# Altium PCB CarteCapteurAvant3.PCBDOC
Units mm, origin at the board's own origin, x right, y up, seen from the top; angles counter-clockwise.
Board outline 299.72 x 199.9 mm, 2 copper layers (Top Layer, Bottom Layer); 58 components, 43 nets, 180 pads, 77 vias.
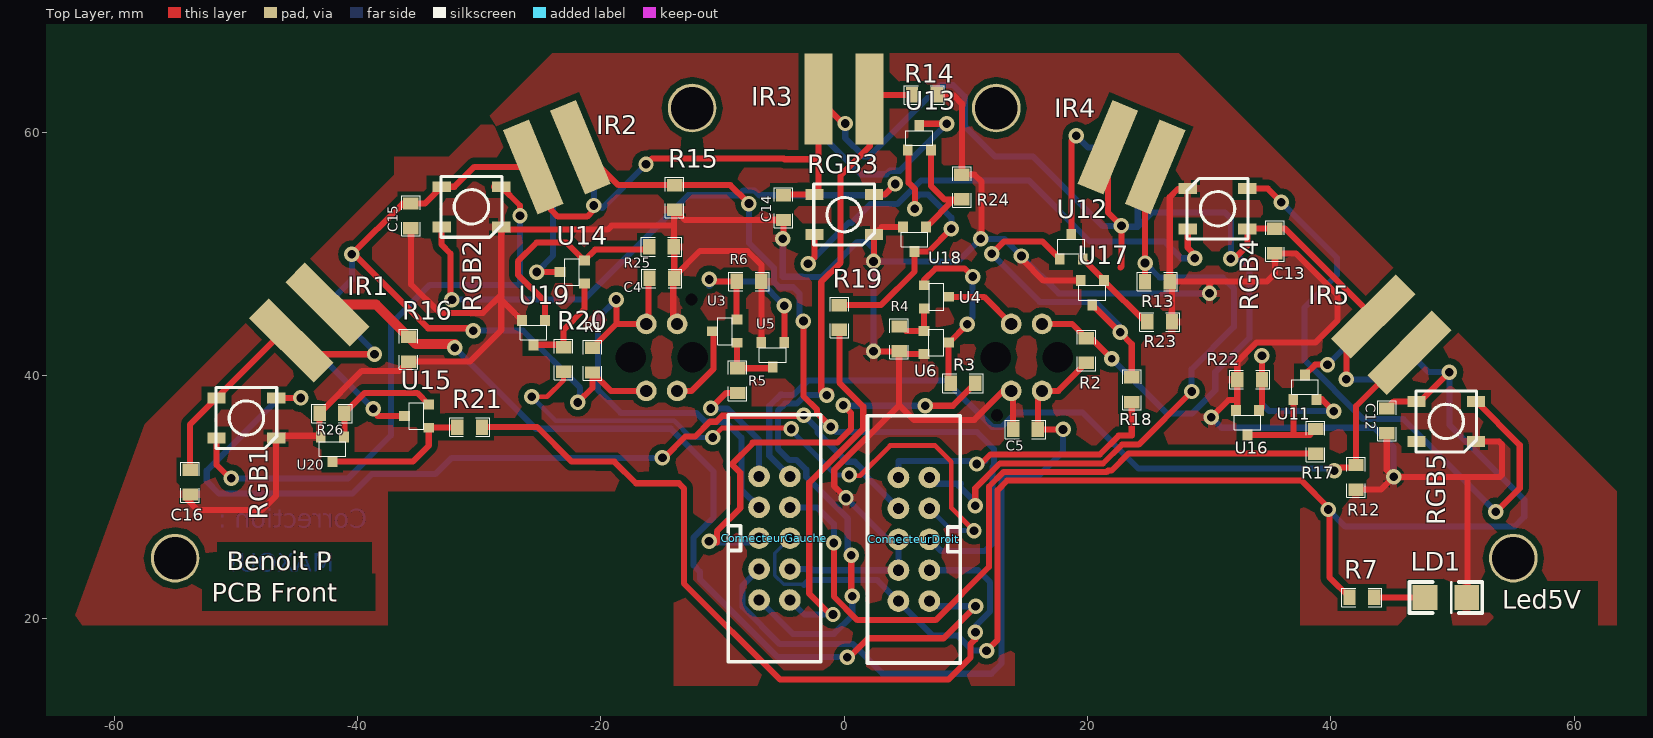
[diagram p0: Top Layer view]
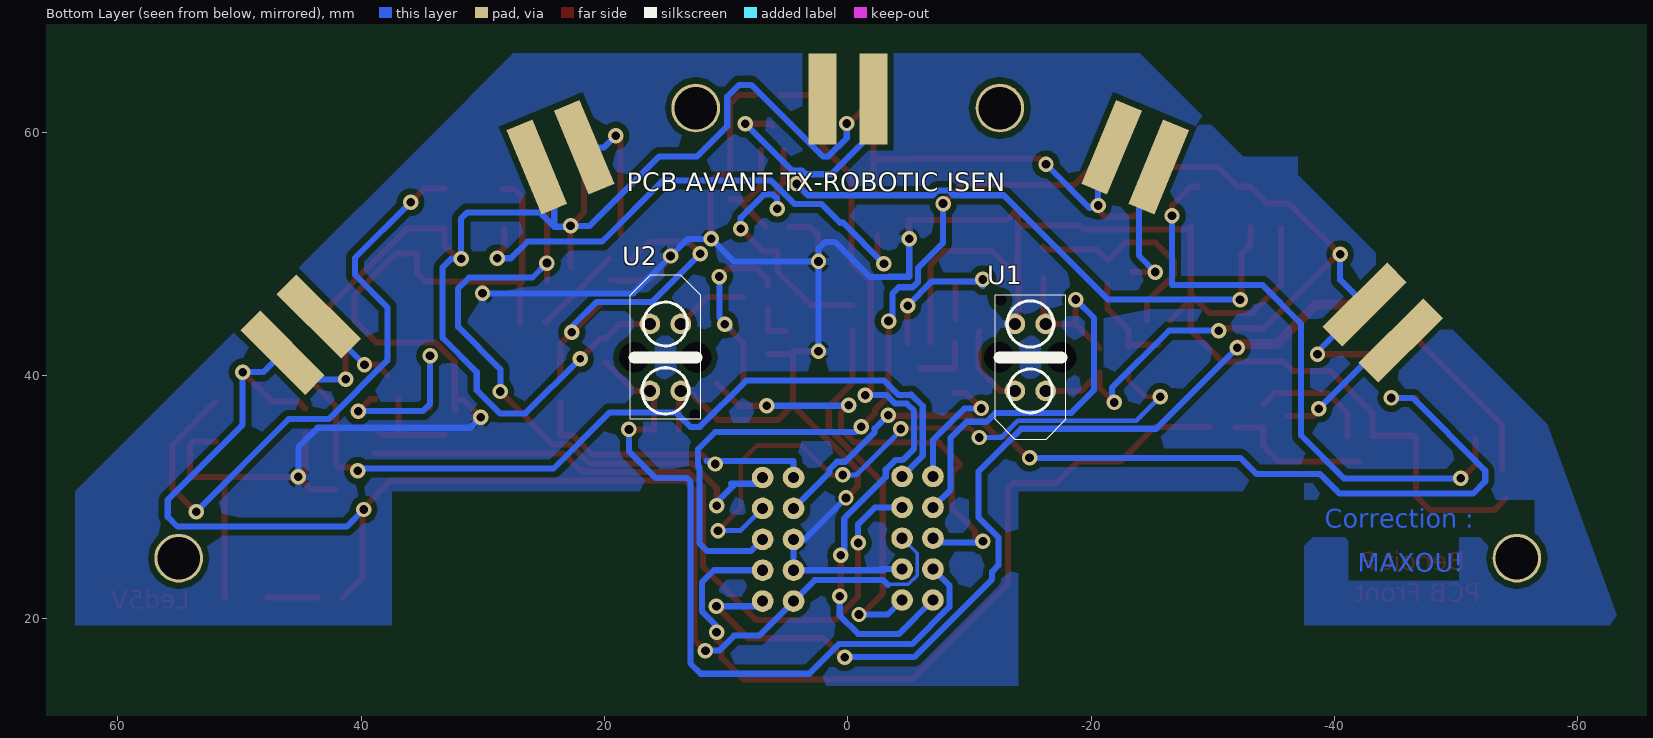
[diagram p1: Bottom Layer view, seen from below]

## Layer stack, top to bottom
Top Solder: solder mask 0.0102, Solder Resist, Dk 3.5
Top Layer: signal copper 0.0356
Dielectric1: dielectric 0.32, FR-4, Dk 4.8
Bottom Layer: signal copper 0.0356
Bottom Solder: solder mask 0.0102, Solder Resist, Dk 3.5

## Board outline
-147.116,-107.604 152.604,-107.604 152.604,92.294 -147.116,92.294

## Design rules (kind name [scope] priority, off if disabled: settings)
Clearance Clearance_bottom_polygon [OnLayer('Bottom Layer') Or OnLayer('Multi-Layer') vs OnLayer('Bottom Layer')  And  InPoly] p1: gap=0.508
Clearance Clearance_top_polygon [OnLayer('Top Layer')  Or OnLayer('Multi-Layer') vs OnLayer('Top Layer') And InPoly] p2: gap=0.508
Clearance Clearance_bottom [OnLayer('Bottom Layer') Or OnLayer('Multi-Layer') vs OnLayer('Bottom Layer')  And Not InPoly] p3: gap=0.203
Clearance Clearance_top [OnLayer('Top Layer')  Or OnLayer('Multi-Layer') vs OnLayer('Top Layer') And Not InPoly] p4: gap=0.203
Clearance Clearance_pad_to_pad [OnLayer('Multi-Layer') vs OnLayer('Multi-Layer')] p5: gap=0.254
ComponentClearance ComponentClearance_bottom [OnLayer('Bottom Overlay') vs OnLayer('Bottom Overlay')] p1: gap=0 collisioncheckmode=3 verticalgap=0.254 showdistances=FALSE
ComponentClearance ComponentClearance_top [OnLayer('Top Overlay') vs OnLayer('Top Overlay')] p2: gap=0 collisioncheckmode=3 verticalgap=0.254 showdistances=FALSE
FabricationTestPointUsage TestPointUsage [All] p1: valid=0 allowmultiple=FALSE
FabricationTestpoint Testpoint [All] p1: side=3 testpointundercomponent=TRUE minsize=1.016 maxsize=2.54 preferedsize=1.524 minholesize=0 maxholesize=1.016 preferedholesize=0.813 testpointgrid=0.025 allowsidetop=TRUE allowsidebottom=TRUE usegrid=TRUE gridtolerance=0
HoleSize [All] p1: absolutevalues=TRUE maxlimit=25.4 minlimit=0.406 maxpercent=80.000 minpercent=20.000
MinimumAnnularRing [PadXSize_AllLayers = PadYSize_AllLayers] p1: minimumring=0.203
PermittedLayers [All] p1: toplayerpermitted=TRUE bottomlayerpermitted=TRUE
PolygonConnect [All] p1: connectstyle=Relief reliefconductorwidth=0.61 reliefentries=4 polygonreliefangle="90 Angle" airgapwidth=0.254
RoutingVias [All] p1: holewidth=0.406 width=0.813 viastyle="Through Hole" minholewidth=0.4 minwidth=0.8 maxholewidth=0.6 maxwidth=10
SMDToPlane [All] p1: distance=0
SolderMaskExpansion [All] p1: expansion=0.102
ViasUnderSMD [All] p1: allowed=FALSE
Width Width_botom_top [OnLayer('Bottom Layer') or OnLayer('Top Layer')] p1: maxlimit=254 minlimit=0.256 preferedwidth=0.813 minimp=50.000000 maximp=50.000000 favimp=50.000000
25 further rules are at their usual default settings.

## Components (designator, comment, footprint, x,y, rotation, side; value= is the part's Value field where it differs from the comment)
C4 "CAP" 0805 -16,48 r0 top
C5 "CAP" 0805 15.92,35.58 r180 top
C12 "CAP" 0805 44.6,37.3 r270 top
C13 "CAP" 0805 35.4,52.09 r270 top
C14 "CAP" 0805 -4.99,54.83 r270 top
C15 "CAP" 0805 -35.61,54.15 r270 top
C16 "CAP" 0805 -53.76,32.27 r270 top
ConnecteurDroit "comment" HE10-10V 7,21.47 r180 top
ConnecteurGauche "comment" HE10-10V -7,31.72 r0 top
IR1 "infrared" Infrared -43.97,44.37 r45 top
IR2 "infrared" Infrared -23.62,57.97 r22.5 top
IR3 "infrared" Infrared 0,62.75 r0 top
IR4 "infrared" Infrared 23.62,57.97 r337.5 top
IR5 "infrared" Infrared 44.97,43.37 r315 top
LD1 "comment" LED1206 51.17,21.77 r180 top
R1 "RES" 0805 -20.69,42.29 r270 top
R2 "RES" 0805 19.9,41.05 r90 top
R3 "RES" 0805 10.78,39.38 r180 top
R4 "RES" 0805 4.51,42.01 r90 top
R5 "RES" 0805 -8.76,38.58 r90 top
R6 "RES" 0805 -6.81,47.75 r180 top
R7 "RES" 0805 43.57,21.77 r180 top
R12 "RES" 0805 42.07,32.66 r270 top
R13 "RES" 0805 24.73,47.73 r0 top
R14 "RES" 0805 5.57,63.08 r0 top
R15 "RES" 0805 -13.93,55.66 r270 top
R16 "RES" 0805 -35.81,43.19 r270 top
R17 "RES" 0805 38.76,33.58 r90 top
R18 "RES" 0805 23.64,37.83 r90 top
R19 "RES" 0805 -0.4,43.77 r90 top
R20 "RES" 0805 -23.06,40.31 r90 top
R21 "RES" 0805 -29.77,35.78 r180 top
R22 "RES" 0805 32.31,39.67 r0 top
R23 "RES" 0805 26.95,44.43 r180 top
R24 "RES" 0805 9.67,56.53 r270 top
R25 "RES" 0805 -14,50.6 r180 top
R26 "RES" 0805 -43.12,36.91 r0 top
RGB1 "LedRgbWs2812b" LedRgbWs2812b -49.14,36.52 r0 top
RGB2 "LedRgbWs2812b" LedRgbWs2812b -30.64,53.88 r0 top
RGB3 "LedRgbWs2812b" LedRgbWs2812b 0,53.24 r0 top
RGB4 "LedRgbWs2812b" LedRgbWs2812b 30.69,53.72 r180 top
RGB5 "LedRgbWs2812b" LedRgbWs2812b 49.49,36.24 r0 top
U1 "TCRT5000" "TCRT5000 Droit" -15,41.5 r270 bottom
U2 "TCRT5000" "TCRT5000 Droit" 15,41.5 r90 bottom
U3 "Transistors" BC817-40 -9.81,43.66 r270 top
U4 "Transistors" BC817-40 7.58,46.48 r90 top
U5 "Transistors" BC817-40 -5.87,41.71 r0 top
U6 "Transistors" BC817-40 7.57,42.73 r90 top
U11 "Transistors" BC817-40 37.87,39.06 r180 top
U12 "Transistors" BC817-40 18.67,50.61 r180 top
U13 "Transistors" BC817-40 6.18,59.55 r180 top
U14 "Transistors" BC817-40 -22.36,48.52 r270 top
U15 "Transistors" BC817-40 -35.15,36.68 r270 top
U16 "Transistors" BC817-40 33.15,36.14 r0 top
U17 "Transistors" BC817-40 20.4,46.82 r0 top
U18 "Transistors" BC817-40 5.78,51.21 r0 top
U19 "Transistors" BC817-40 -25.54,43.54 r0 top
U20 "Transistors" BC817-40 -42.07,33.96 r0 top

## Footprints (in the part's own frame and the unit in brackets; to place one, negate y for a bottom-side part, rotate by r counter-clockwise, add the part's x,y. Pads: shape width x height; smd on the part's side, far side on the other; paste and mask are expansions set on the pad)
0805 [mil]
  rect 40x50 smd: 1(0,0) 2(80,0)
  silkscreen extent -25,-30 105,30
BC817-40 [mm]
  rect 0.8x0.9 smd: 1(0.95,1) 2(-0.95,1) 3(0,-1)
  silkscreen extent -1.1,-0.6 1.1,0.6
HE10-10V [mil]
  round 70 hole 36: 1(0,0) 2(100,0) 3(0,-100) 4(100,-100) 5(0,-200) 6(100,-200) 7(0,-300) 8(100,-300) 9(0,-400) 10(100,-400)
  silkscreen extent -100,-600 200,200
Infrared [mm]
  rect 2.3x7.5 smd far side: gndEmitter(-2.1,0) VCC(2.1,0)
  rect 2.3x7.5 smd: gndReceiver(2.1,0) VCC(-2.1,0)
LED1206 [mil]
  rect 80x80 smd: A(135,0) K(0,0)
  silkscreen extent -50,-50 185,50
LedRgbWs2812b [mm]
  rect 1.5x0.9 smd: din(2.45,1.65) dout(-2.45,-1.65) GND(2.45,-1.65) VCC(-2.45,1.65)
  silkscreen extent -2.5,-2.5 2.5,2.5
"TCRT5000 Droit" [mm]
  round 1.7 hole 1: 1(-2.75,1.27) 2(2.75,1.27) 3(-2.75,-1.27) 4(2.75,-1.27)
  round 0 hole 1: 21(-4.75,-2.45)
  round 1.524 hole 2.5: 21(0,2.54) 22(0,-2.54)
  silkscreen extent -5.1,-2.9 6.75,2.9

## Part data
C4 C5 C12 C13 C14 C15 C16: "capacité non polarisée"
ConnecteurDroit ConnecteurGauche: library part HE10-10, "10-pin connector"
IR1 IR2 IR3 IR4 IR5: library part RPR-359F
LD1: library part LED, "LED 5mm/3mm/CMS"
R1 R2 R3 R4 R5 R6 R7 R12 R13 R14 R15 R16 R17 R18 R19 R20 R21 R22 R23 R24 R25 R26: "resistance"
U11 U12 U13 U14 U15 U16 U17 U18 U19 U20: "NPN transistor"

## Free pads (board coordinates)
  round 4 hole 3.5: 0(-55,25) 1(-12.5,62) 2(12.5,62) 3(55,25)

## Via types
v1: diameter 1.27, hole 0.711, Top Layer to Bottom Layer, 76 vias
v2: diameter 1.27, hole 0.6, Top Layer to Bottom Layer, 1 vias

## Nets (pads, with @x,y where several pads share a name; then routed paths per layer and width w, separated by ;. In a path a pad name is that pad's centre, name@x,y a point inside that pad or via, vN(x,y) a via of type N, cw(c..) or ccw(c..) an arc to the next point about the centre after c; other vN are vias at no path point)
GND: C4.2 C5.2 C12.2 C13.2 C14.2 C15.2 C16.2 ConnecteurDroit.4 ConnecteurDroit.6 ConnecteurGauche.8 LD1.K R4.1 R6.1 R12.2 R13.2 R14.2 R15.2 R16.2 R22.1 R23.1 R24.1 R25.1 R26.1 RGB1.GND RGB2.GND RGB3.GND RGB4.GND RGB5.GND U1.3 U2.3 U5.2 U6.2 U16.2 U17.2 U18.2 U19.2 U20.2 | length 333.8
  Top Layer w0.5: C16.2@-54.089,29.909 -53.13,28.95 -47.87,28.95 -46.69,30.13 RGB1.GND ; RGB1.GND@-46.5,35.06 -43.12,35.06 R26.1 -39.64,40.39 -36.578,40.39 R16.2 -30.782,41.158 -28.19,43.75 -28.19,46.24 ; C15.2 -35.61,47.51 -33.262,45.162 -29.688,45.162 -28.19,46.66 ; U19.2 -28.19,46.24 ; U1.3@-14.048,44.568 -14.048,48.07 C4.2@-13.968,48.15 ; U5.2@-6.81,42.72 R6.1 -6.81,49.11 -7.95,50.25 -11.868,50.25 C4.2@-13.968,48.15 ; v1(-5.05,51.27) -4.99,51.33 C14.2 -13.1,52.798 R15.2 -14,53.558 -14,52.34 ; v1(0.15,29.95) -0.82,30.92 -0.82,32.251 4.51,37.581 ; v1(2.41,42) 4.5,42 R4.1 4.51,37.59 ; v1(2.41,49.39) 2.45,49.43 RGB3.GND 3.07,52.21 U18.2 ; 4.514,37.586 5.73,36.37 10.69,36.37 13.07,38.75 U2.3 13.888,38.592 C5.2 ; R4.1@4.74,41.78 U6.2 ; R14.2 8.96,63.08 9.67,62.37 R24.1 10.71,56.53 11.29,55.95 11.29,51.32 v1(11.22,51.25) ; v1@14.62,49.57 16.37,47.82 U17.2 ; R23.1 26.95,47.542 R13.2 ; RGB4.GND@28.38,55.36 27.44,55.36 26.762,54.682 R13.2 ; v1(30.03,46.77) 30.03,47.51 30.25,47.73 ; v1(30.18,36.57) 31.61,38 32.31,38 ; U16.2 32.31,37.25 32.31,38 ; R12.2 44.108,30.628 v1(45.16,31.68) ; C12.2 44.6,32.24 v1(45.16,31.68) ; LD1.K 51.25,21.85 51.25,31.68 ; RGB5.GND 53.82,34.59 54.06,34.35 54.06,31.84 53.9,31.68 51.25,31.68 ; -28.19,46.24 -28.19,46.66 ; -28.19,46.66 RGB2.GND -27.96,52 -19.451,52 -19.111,52.34 -14,52.34 ; -14,52.34 R25.1 -13.968,50.568 C4.2@-13.968,48.15 ; R13.2 30.25,47.73 ; 30.25,47.73 34.75,47.73 35.4,48.38 C13.2 37.122,50.058 40.56,46.62 40.56,44.55 38.728,42.718 33.889,42.718 32.31,41.139 R22.1 32.31,38 ; v1(45.16,31.68) 51.25,31.68
  Bottom Layer w0.5: v1(-5.05,51.27) -5.05,48.13 -3.429,48.13 -3.421,48.122 -1.788,48.122 1.09,51 1.85,51 2.41,50.44 v1(2.41,49.39) ; ConnecteurGauche.8 -2.69,24.1 ; -2.99,24.01 ConnecteurDroit.4 ConnecteurDroit.6 3.55,26.55 v1(0.15,29.95) ; v1@2.41,42.3 v1(2.41,49.39) ; v1(30.03,46.77) 17.64,46.77 v1(14.57,49.84) 13.16,51.25 v1(11.22,51.25) 9.36,49.39 v1(2.41,49.39) ; v1(30.18,36.57) 31.03,35.72 43.58,35.72 45.16,34.14 v1(45.16,31.68)
LEFTLINESENSOR: C4.1 ConnecteurGauche.3 R1.1 U1.1 | length 38.8
  Top Layer w0.5: R1.1 -18.73,44.25 ; v1@-18.79,46.32 v1(-18.73,46.26) -18.73,44.25 ; U1.1 -18.73,44.25 ; U1.1@-16.08,44.44 C4.1@-16.08,48.07
  Bottom Layer w0.5: v1(-18.73,46.26) -20.25,44.74 -20.25,38.83 -18.366,36.946 -12.145,36.946 -11.416,36.217 -9.767,36.217 -8.45,34.9 -8.45,30.63 ConnecteurGauche.3
LEFTLINESENSOR_COMMANDE: ConnecteurGauche.1 R5.1 | length 10.8
  Top Layer w0.5: v1(-10.965,37.305) -9.69,38.58 R5.1
  Bottom Layer w0.5: v1(-10.965,37.305) -9.605,37.305 -7,34.7 ConnecteurGauche.1
LEFTSENSOR: ConnecteurDroit.1 IR1.gndReceiver R16.1 | length 77.6
  Top Layer w0.5: v1@0.665,17.105 1.98,18.42 8.17,18.42 v1(10.8,21.05)
  Top Layer w0.8: IR1.gndReceiver -38.475,45.855 R16.1 -35.22,42.6 v1@-32,42.6
  Bottom Layer w0.5: v1(-32,42.3) -25.34,35.64 -14.25,35.64 -10.73,32.12 -10.73,28.36 -12.38,26.71 -12.38,24.41 -11.86,23.89 -11.86,23.271 -5.449,16.86 v1(0.26,16.86) ; ConnecteurDroit.1 7.42,21.05 v1(10.8,21.05)
LEFTSENSORCOMMAND: ConnecteurDroit.3 R21.1 | length 66.3
  Top Layer w0.5: R21.1 -25.24,35.78 -22.4,32.94 -20.45,32.94 -20.442,32.932 -18.885,32.932 -17.113,31.16 -13.59,31.16 -13.17,30.74 -13.17,22.92 -5.28,15.03 8.58,15.03 10.372,16.822 10.372,17.919 10.79,18.337 v1(10.79,18.92)
  Bottom Layer w0.5: ConnecteurDroit.3 11,24.01 12,23.01 12,20.62 10.79,19.41 v1(10.79,18.92)
MIDLEFTSENSOR: ConnecteurDroit.5 IR2.gndReceiver R15.1 | length 65
  Top Layer w0.5: IR2.gndReceiver -18.566,55.66 R15.1 -9.35,55.66 v1@-7.98,54.29 ; v1(-3.35,44.49) -3.35,38.329 -2.222,37.201 -2.222,36.902 v1(-1.11,35.79)
  Bottom Layer w0.5: v1(-7.83,54.15) -7.83,50.91 -5.753,48.833 -5.753,47.679 -5.341,47.267 -4.187,47.267 -3.686,46.766 v1@-3.686,44.55 ; v1(-1.11,35.79) -0.69,35.37 10.91,35.37 12.313,33.967 12.313,32.586 12.2,32.472 12.2,26.23 11.55,25.58 7.97,25.58 ConnecteurDroit.5
MIDLEFTSENSORCOMMAND: ConnecteurDroit.7 R20.1 | length 53.3
  Top Layer w0.4: v1(-25.67,38.27) -24.43,38.27 -23.06,39.64 R20.1 ; v1@-10.64,35.11 -10.04,35.71 -4.27,35.71 v1(-4.36,35.62) ; v1@0.63,31.78 1.3,31.78 3.77,34.25 7.48,34.25 8.8,32.93 8.8,29.13 v1(10.67,27.26)
  Bottom Layer w0.4: v1(-25.67,38.27) -23.693,36.293 -13.979,36.293 -12.606,34.92 v1(-10.8,34.92) ; v1@-4.005,35.145 -0.7,31.84 v1(0.43,31.84) ; ConnecteurDroit.7 8.83,27.26 v1(10.67,27.26)
MIDRIGHTSENSOR: ConnecteurDroit.9 IR4.gndReceiver R13.1 | length 55.6
  Top Layer w0.5: v1(10.77,29.32) 10.77,30.75 12.8,32.78 21.274,32.78 22.834,34.34 24.2,34.34 v1(28.56,38.7) ; R13.1 v1(24.73,49.26) 24.73,56.336 IR4.gndReceiver
  Bottom Layer w0.5: ConnecteurDroit.9 7.51,31.12 9.59,31.12 9.415,30.945 10.77,29.59 v1(10.77,29.32) ; v1(24.73,49.26) 25.92,48.07 31.13,48.07 32.03,47.17 32.03,44.01 28.56,40.54 v1(28.56,38.7)
MIDRIGHTSENSORCOMMAND: ConnecteurDroit.10 R18.1 | length 24.9
  Top Layer w0.5: v1@11.04,32.55 12.01,33.52 21.02,33.52 22.57,35.07 23.64,35.07 R18.1
  Bottom Layer w0.5: ConnecteurDroit.10 4.46,32.99 11.61,32.99
  other v1: 10.91,32.74
MIDSENSOR: ConnecteurGauche.9 IR3.gndReceiver R14.1 | length 63.2
  Top Layer w0.5: v1@-1.125,38.715 -1.885,38.715 -1.885,47.705 -0.3,49.29 -0.3,56.47 2.1,58.87 IR3.gndReceiver 2.43,63.08 R14.1 ; v1@0.58,22.17 v1(0.58,25.24)
  Bottom Layer w0.5: ConnecteurGauche.9 -4.21,18.77 -0.85,18.77 0.66,20.28 v1(0.66,21.88) ; v1(-1.44,38.4) -3.187,38.4 -3.888,37.699 -4.861,37.699 -5.448,37.112 -5.448,34.009 -4.501,33.062 -3.904,33.062 -3.118,32.276 -3.118,31.679 0.29,28.271 0.29,25.53 v1@0.41,25.41
MIDSENSORCOMMAND: ConnecteurGauche.10 R19.1 | length 31.5
  Top Layer w0.5: v1@-0.92,20.14 -2.87,22.09 -2.87,31.204 -0.278,33.797 -0.269,33.797 1.57,35.636 1.57,37.459 -0.4,39.429 R19.1
  Bottom Layer w0.5: ConnecteurGauche.10 -3.27,20.37 v1(-0.92,20.37) v1@-0.69,20.14
NetIR1_gndEmitter: IR1.gndEmitter U15.3 | length 11.3
  Top Layer w0.5: -38.34,36.68 U15.3
  Bottom Layer w0.5: IR1.gndEmitter -44.295,42.885 v1(-38.7,37.29)
NetIR2_gndEmitter: IR2.gndEmitter U14.3 | length 11.8
  Top Layer w0.5: v1@-25.3,48.5 v1(-25.28,48.52) U14.3
  Bottom Layer w0.5: IR2.gndEmitter -23.92,55.526 -23.92,52.29 -23.92,49.88 v1(-25.28,48.52)
NetIR3_gndEmitter: IR3.gndEmitter U13.3 | length 18.7
  Top Layer w0.5: U13.3 6.34,60.71 v1(8.43,60.71)
  Bottom Layer w0.5: IR3.gndEmitter -2.1,60.02 1.36,56.56 3.471,56.56 3.759,56.848 4.568,56.848 v1(8.43,60.71)
NetIR4_gndEmitter: IR4.gndEmitter U12.3 | length 11.3
  Top Layer w0.5: U12.3 18.67,59.33 v1(19.07,59.73)
  Bottom Layer w0.5: v1(19.07,59.73) 20.026,58.774 IR4.gndEmitter
NetIR5_gndEmitter: IR5.gndEmitter U11.3 | length 7.7
  Top Layer w0.5: U11.3 38.71,40.9 38.7,40.91 v1(39.73,40.91)
  Bottom Layer w0.5: v1(39.73,40.91) 43.485,44.665 IR5.gndEmitter
NetLD1_A: LD1.A R7.1 | length 4.2
  Top Layer w0.5: R7.1 LD1.A
NetR3_2: R3.2 U4.1 U6.3 | length 15.1
  Top Layer w0.5: U4.1 6.58,47.88 7.51,48.81 9.9,48.81 v1(10.56,48.15) ; R3.2@8.588,39.47 8.57,39.488 U6.3 8.62,42.73 v1(10.11,44.22)
  Bottom Layer w0.5: v1@9.67,43.91 10.56,44.8 v1(10.56,48.15)
NetR4_2: R4.2 U4.2 U6.1 | length 3.3
  Top Layer w0.5: R4.2@5.1,43.68 U6.1 6.56,43.69 U4.2@6.56,45.46
NetR5_2: R5.2 U3.1 U5.3 | length 4.9
  Top Layer w0.5: U3.1 -8.81,40.662 R5.2 U5.3@-5.968,40.612
NetR6_2: R6.2 U3.2 U5.1 | length 16.2
  Top Layer w0.5: v1(-11.09,47.91) -10.93,47.75 R6.2 U3.2@-8.842,44.642 ; U5.1 v1(-4.92,45.76)
  Bottom Layer w0.5: v1(-11.09,47.91) -11.09,47.37 -10.71,47.75 -6.91,47.75 v1(-4.92,45.76)
NetR17_2: R17.2 U11.1 U16.3 | length 8.5
  Top Layer w0.5: U16.3 38.288,35.14 R17.2 ; 36.92,35.32 U11.1
NetR18_2: R18.2 U12.1 U17.3 | length 26.9
  Top Layer w0.5: v1(12.12,50.02) 13.14,51.04 16.29,51.04 U12.1 ; U17.3 22.66,43.56 v1(22.68,43.56) 23.64,42.6 R18.2
  Bottom Layer w0.5: v1(12.12,50.02) 16.073,46.067 20.653,46.067 v1@22.63,44.09
NetR19_2: R19.2 U13.1 U18.3 | length 23.5
  Top Layer w0.5: R19.2 3.022,45.802 5.78,48.56 U18.3 6.94,50.21 v1(8.81,52.08) ; U13.1 5.298,58.482 5.298,55.862 5.81,55.35 v1(5.81,53.73)
  Bottom Layer w0.5: v1(5.81,53.73) 5.81,54.54 6.16,54.89 6.91,54.89 8.81,52.99 v1(8.81,52.08)
NetR20_2: R20.2 U14.1 U19.3 | length 8.5
  Top Layer w0.5: U19.3 -23.258,42.54 R20.2 -23.06,43.78 -21.36,45.48 U14.1
NetR21_2: R21.2 U15.1 U20.3 | length 12.2
  Top Layer w0.5: U20.3 -35.44,32.96 -34.15,34.25 U15.1 R21.2@-31.852,35.73
NetR22_2: R22.2 U11.2 U16.1 | length 16.2
  Top Layer w0.5: v1(34.34,41.63) 34.34,39.672 R22.2 U16.1@34.342,37.382 ; U11.2 39.27,38.06 v1(40.24,37.09)
  Bottom Layer w0.5: v1@34.34,41.71 v1(34.34,41.63) 34.34,37.69 34.94,37.09 v1(40.24,37.09)
NetR23_2: R23.2 U12.2 U17.1 | length 7.5
  Top Layer w0.5: U12.2 21.35,47.88 U17.1 24.74,44.43 R23.2
NetR24_2: R24.2 U13.2 U18.1 | length 9.8
  Top Layer w0.5: U18.1 9.018,54.498 R24.2 8.232,54.498 7.13,55.6 U13.2
NetR25_2: R25.2 U14.2 U19.1 | length 18.3
  Top Layer w0.5: U19.1 -24.59,46.06 -26.82,48.29 -26.82,49.4 -25.27,50.95 -22.84,50.95 U14.2 -20.47,50.36 -16.272,50.36 R25.2
NetR26_2: R26.2 U15.2 U20.1 | length 9.9
  Top Layer w0.5: U20.1@-41.088,34.992 R26.2 -39.418,38.58 -35.1,38.58 U15.2
NetRGB1_dout: RGB1.dout RGB2.din | length 48.6
  Top Layer w0.5: RGB1.dout -51.59,32.66 v1@-50.57,31.64 ; RGB2.din@-28.8,55.53 RGB2.din -26.65,53.99 v1(-26.65,53.14)
  Bottom Layer w0.5: v1(-50.37,31.56) -40.78,31.56 -37.25,35.09 -37.25,44.26 -34.05,47.46 -26.65,47.46 v1(-26.65,53.14)
NetRGB2_dout: RGB2.dout RGB3.din | length 48.7
  Top Layer w0.5: RGB2.dout -33.09,50.77 -32.36,50.04 v1@-32.36,46.66 ; RGB3.din 3.34,54.89 v1(4.21,55.76)
  Bottom Layer w0.5: v1(-32.24,46.25) -21.4,46.25 -12.82,54.83 -8.689,54.83 -8.281,55.238 -7.379,55.238 -6.971,54.83 3.28,54.83 v1@4.18,55.73
NetRGB3_dout: RGB3.dout RGB4.din | length 42.1
  Top Layer w0.5: v1(-2.97,49.21) -2.45,49.73 RGB3.dout ; RGB4.din 28.24,50.52 v1@28.74,50.02
  Bottom Layer w0.5: v1(-2.97,49.21) 0.39,52.57 0.62,52.57 2.176,54.126 4.394,54.126 6.318,56.05 15.17,56.05 20.19,51.03 26.31,51.03 27.69,49.65 v1(28.82,49.65)
NetRGB4_dout: RGB4.dout RGB5.din | length 51.5
  Top Layer w0.5: RGB4.dout 34.83,55.37 v1(35.94,54.26) ; RGB5.din 55.53,34.3 55.53,30.75 v1@53.6,28.82
  Bottom Layer w0.5: v1(35.94,54.26) 40.51,49.69 40.51,48.28 37.84,45.61 37.84,41.261 42.678,36.423 45.977,36.423 v1(53.57,28.83)
NetU1_4: U1.4 U3.3 | length 6.9
  Top Layer w0.5: U1.4 -12.54,38.75 -10.757,40.533 -10.757,43.607 U3.3
NetU2_4: U2.4 U4.3 | length 6.1
  Top Layer w0.5: U4.3 11.5,46.48 U2.4
"RGB LED FRONT": ConnecteurDroit.8 RGB1.din | length 76.8
  Top Layer w0.5: RGB1.din v1(-44.66,38.17) v1@-44.63,38.14 ; v1@-15.12,33.25 v1(-14.94,33.25) -14.8,33.25 -13.048,35.002 -12.257,35.002 -11.042,36.217 -10.514,36.217 -10.023,36.708 -3.352,36.708 v1(-3.31,36.75)
  Bottom Layer w0.5: v1(-44.66,38.17) -46.42,38.17 -52.4,32.19 -52.4,31.31 -51.39,30.3 -40.44,30.3 -38.81,31.93 -33.59,31.93 -32.27,33.25 v1(-14.94,33.25) ; v1(-3.31,36.75) -2.198,35.638 -2.198,35.339 0.213,32.928 0.881,32.928 1.518,32.291 1.518,32.032 ConnecteurDroit.8
RIGHTLINESENSOR: C5.1 ConnecteurGauche.7 R2.1 U2.1 | length 60.6
  Top Layer w0.5: v1@18.11,35.7 v1(17.99,35.58) C5.1 15.92,38.4 U2.1 17.6,38.75 R2.1
  Bottom Layer w0.5: ConnecteurGauche.7 -8.342,22.758 -8.342,20.992 -5.28,17.93 -0.209,17.93 -0.191,17.948 0.711,17.948 3.159,15.5 12.1,15.5 12.94,16.34 12.94,31.31 13.21,31.58 15.77,31.58 17.99,33.8 v1(17.99,35.58)
RIGHTLINESENSOR_COMMANDE: ConnecteurGauche.5 R3.1 | length 37.2
  Top Layer w0.5: -10.47,26.3 -10.47,27.194 -8.547,29.118 -8.547,32.021 -9.238,32.712 -7.495,34.455 ; -7.54,34.5 -0.56,34.5 0.55,35.61 0.55,36.94 v1(-0.09,37.58) ; v1(6.67,37.53) 8.93,37.53 R3.1
  Bottom Layer w0.5: v1(-11.11,26.38) -10.9,26.38 -10.82,26.3 -7.72,26.3 -7.38,26.64 ConnecteurGauche.5 ConnecteurGauche.5@-7.33,26.31 ; v1(-0.09,37.58) -0.04,37.53 v1(6.67,37.53)
RIGHTSENSOR: ConnecteurGauche.2 IR5.gndReceiver R12.1 | length 70.8
  Top Layer w0.5: v1(40.27,32.18) 40.5,32.18 40.79,32.47 41.88,32.47 R12.1 42.07,37.5 IR5.gndReceiver
  Bottom Layer w0.5: ConnecteurGauche.2 -6.16,33.42 -6.16,37.51 -5.232,38.438 -5.117,38.438 -5.081,38.402 -4.179,38.402 -2.991,39.59 8.362,39.59 12.155,35.797 12.945,35.797 14.128,36.98 19.57,36.98 24.18,32.37 v1@40.27,32.37
RIGHTSENSORCOMMAND: ConnecteurGauche.4 R17.1 | length 60.1
  Top Layer w0.5: v1@-0.85,25.744 -0.85,21.851 1.091,19.91 7.52,19.91 11.904,24.294 11.904,30.89 13.091,32.077 21.566,32.077 21.682,32.193 21.973,32.193 23.39,33.61 R17.1@38.95,33.61
  Bottom Layer w0.5: ConnecteurGauche.4 -2.24,29.18 -0.85,27.79 v1@-0.85,25.96
  other v1: -0.85,26.25
"VCC 5V": C12.1 C13.1 C14.1 C15.1 C16.1 ConnecteurDroit.2 ConnecteurGauche.6 IR1.VCC IR2.VCC IR3.VCC IR4.VCC IR5.VCC R1.2 R2.2 R7.2 RGB1.VCC RGB2.VCC RGB3.VCC RGB4.VCC RGB5.VCC U1.2 U2.2 | length 367.8
  Top Layer w0.5: C16.1@-53.78,32.27 -53.78,35.98 RGB1.VCC -46.875,42.885 -45.455,42.885 -44.33,41.76 v1(-38.61,41.76) ; v1@-31,43.9 -34.2,43.9 -40.27,49.97 v1(-40.47,49.97) -36.29,54.15 C15.1 -34.47,54.15 RGB2.VCC -32.04,55.53 -30.404,57.166 -25.56,57.166 -24.1,55.706 -24.1,53.63 -23.54,53.07 -21.13,53.07 -20.58,53.62 v1(-20.58,53.99) ; v1(-21.9,37.8) -20.69,39.01 R1.2 -19.182,38.75 U1.2 ; v1(-16.29,57.37) -15.81,57.85 -4.95,57.85 -4.89,57.79 -2.1,57.79 ; C14.1 -4.93,54.89 RGB3.VCC -2.1,55.24 -2.1,57.79 ; v1@-0.185,60.835 -2.1,62.75 -2.1,57.79 ; v1(11.7,17.4) 12.607,18.307 12.607,30.598 13.383,31.374 21.857,31.374 21.883,31.4 37.566,31.4 v1@39.883,29.083 ; U2.2 18.732,44.25 R2.2 20.318,43.082 v2(22,41.4) ; IR4.VCC@21.68,58.774 21.68,53.43 v1(22.79,52.32) 22.79,48.99 22.7,48.9 ; v1@31.9,49.45 33.14,50.69 33.14,52.09 C13.1 36.25,52.09 43.485,44.855 41.28,42.65 v1(41.28,39.7) ; v1@39.9,29 39.9,23.408 R7.2 ; C12.1 45.19,37.89 RGB5.VCC 47.35,37.89 v1(49.75,40.29)
  Bottom Layer w0.305: ConnecteurGauche.6 -5.7,25.4 -5.7,24.915 -5.705,24.91 -5.705,23.584 -4.976,22.855 -3.355,22.855 -3.3,22.8
  Bottom Layer w0.5: v1(-40.47,49.97) -40.47,47.87 -42.485,45.855 -38.61,41.98 v1(-38.61,41.76) ; v1(-30.5,43.7) -26.4,43.7 -21.7,39 v1@-21.7,37.6 ; IR2.VCC@-21.68,58.774 -20.55,57.644 -20.55,54.43 -19.89,53.77 v1(-16.29,57.37) ; -3.3,22.8 -2.9,23.2 2.73,23.2 ConnecteurDroit.2 7.297,18.633 9.332,18.633 10.566,17.4 v1(11.7,17.4) ; v1(0.09,60.73) 0.09,59.53 1.59,58.03 2.05,58.03 7.93,63.91 8.94,63.91 9.91,62.94 9.91,60.51 12.39,58.03 15.51,58.03 21.22,52.32 v1(22.79,52.32) 22.87,52.24 24.13,52.24 ; v2(22,41.4) 26.5,36.9 28.6,36.9 30.5,38.8 30.5,40.3 33.3,43.1 33.3,48.9 32.59,49.61 v1(31.78,49.61) 31.78,52.93 31.29,53.42 25.31,53.42 24.13,52.24 ; IR4.VCC@25.56,57.166 24.13,55.736 24.13,52.24 ; v1@40.1,29 v1(39.8,29) 41.2,27.6 55.1,27.6 55.9,28.4 55.9,29.8 49.75,35.95 v1(49.75,40.29) 48.05,40.29 46.455,41.885 44.27,39.7 v1(41.28,39.7)
pads on no net: RGB5.dout U1.21 U1.22 U2.21 U2.22

## Polygon pours and split planes (outlines as drawn)
GND on Bottom Layer "Bottom Layer-No Net" (solid, pour order 4): -63.5,19.5 -37.5,19.5 -37.5,30.5 -14,30.5 -14,14.5 14,14.5 14,30.5 37.5,30.5 37.5,19.5 63.5,19.5 63.5,30.5 35,59 27.5,66.5 -9.5,66.5 -24,66.5 -32,58.5 -32.5,58 -37,58 -37,56.5 -54,39.5 -57.5,36
GND on Top Layer "Bottom Layer-No Net" (solid, pour order 6): -63.5,19.5 -37.5,19.5 -37.5,30.5 -14,30.5 -14,14.5 13.5,14.5 14,14.5 14,30.5 37.5,30.5 37.5,19.5 63.5,19.5 63.5,30.5 27.5,66.5 -24,66.5 -32.5,58 -37,58 -37,56.5 -57.5,36

## Keep-outs
Keep-Out Layer:
  rectangle: -146.156,-103.944 -141.156,96.056
  rectangle: -141.156,-103.944 148.844,-98.944
  rectangle: 143.844,-98.944 148.844,96.056
  rectangle: -141.156,91.056 143.844,96.056

## Other copper
Top Layer:
  text "Benoit P" at -50.77,24.01 h1.52
  text "PCB Front" at -51.99,21.42 h1.52
  text "Led5V" at 54.1,20.84 h1.52
Bottom Layer:
  text "Correction :" at -39.2,27.5 h1.52
  text "MAXOU!" at -41.9,23.9 h1.52

## Silkscreen, mask and mechanical layers (free items; w line width, h text height)
Top Overlay:
  text "Benoit P" at -50.77,24.01 h1.52
  text "PCB Front" at -51.99,21.42 h1.52
  text "Led5V" at 54.1,20.84 h1.52
Bottom Overlay:
  text "PCB AVANT TX-ROBOTIC ISEN" at 18.16,55.17 h1.52
Mechanical 1:
  lines w0.2: -63.432,19.524 cw(c0.068,0.021) 63.575,19.5 37.75,19.5 37.75,30.5 13.75,30.5 13.75,14.5 -13.75,14.5 -13.75,30.5 -37.75,30.5 -37.75,19.5 -63.4,19.5